# Altium PCB PCB1.pcbdoc
Units mil, origin at the board's own origin, x right, y up, seen from the top; angles counter-clockwise.
Board outline 1426.3 x 823.83 mil, 2 copper layers (Top Layer, Bottom Layer); 5 components, 12 nets, 36 pads, 73 vias.
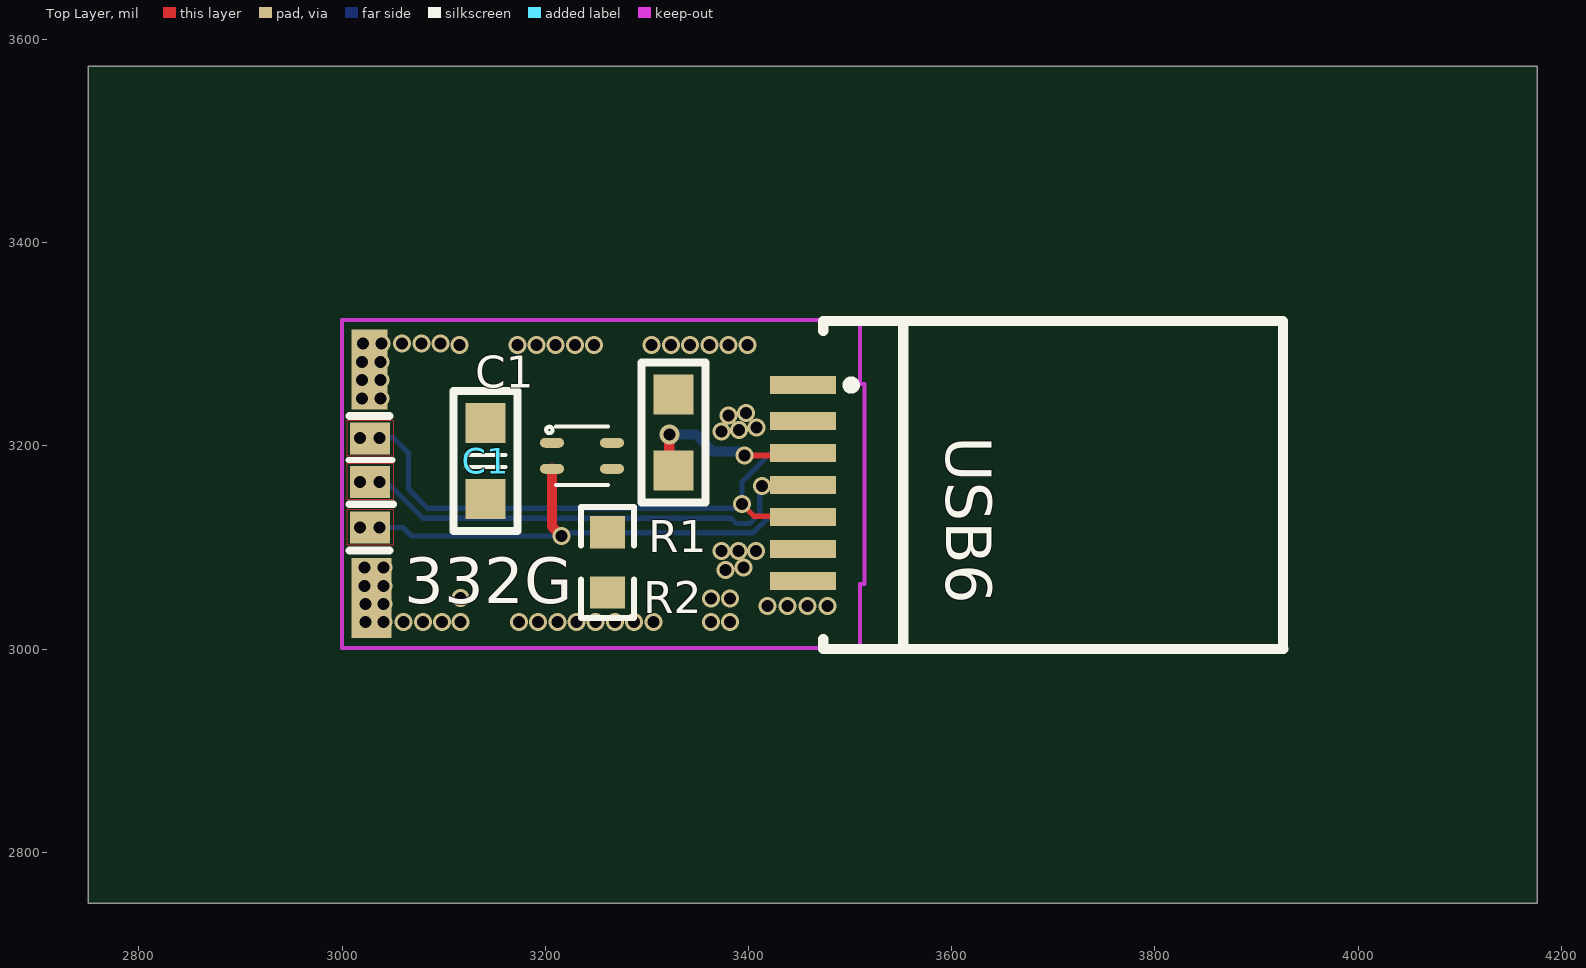
[diagram p0: Top Layer view]
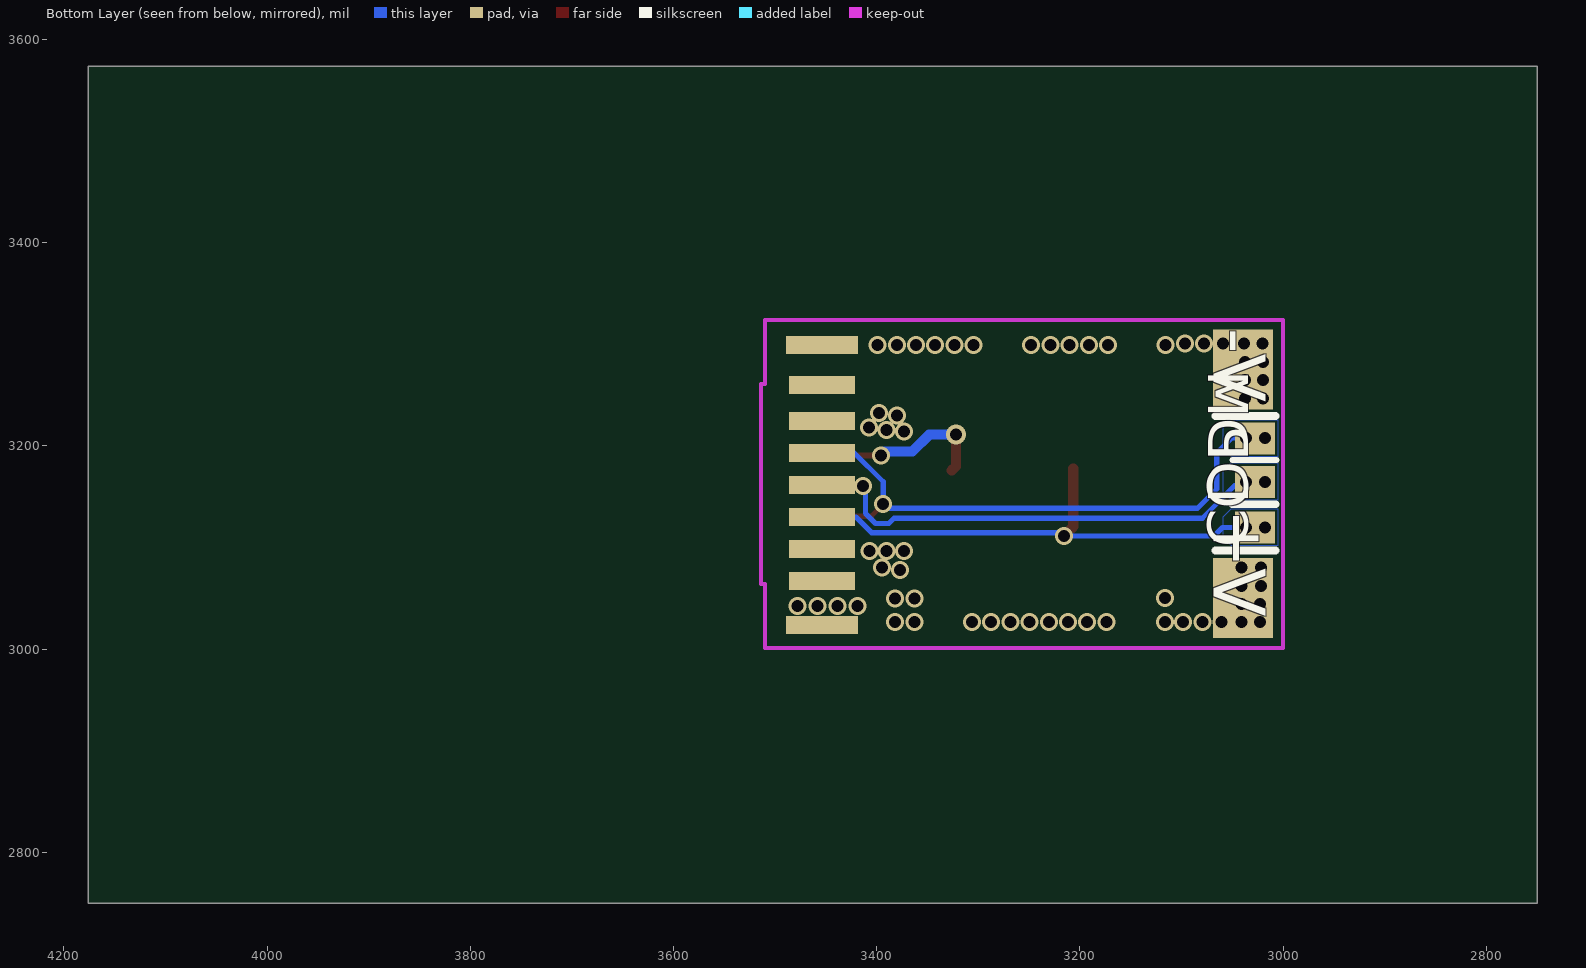
[diagram p1: Bottom Layer view, seen from below]

## Layer stack, top to bottom
Top Layer: signal copper (thickness not stored)
Dielectric: dielectric 12.6, FR-4, Dk 4.8
Bottom Layer: signal copper (thickness not stored)

## Board outline
4176.3,2750 2750,2750 2750,3573.83 4176.3,3573.83

## Design rules (kind name [scope] priority, off if disabled: settings)
BoardOutlineClearance copperThickness1oz [All] p0: genericclearance=10 ignorepadtopadclearanceinfootprint=FALSE except(0: Arc-SplitContinuation Track-SplitContinuation SMDPad-SplitContinuation THPad-SplitContinuation Via-SplitContinuation Fill-SplitContinuation Poly-SplitContinuation Region-SplitContinuation Text-SplitContinuation; 6: Track-CutoutEdge SMDPad-CutoutEdge THPad-CutoutEdge Via-CutoutEdge Region-CutoutEdge; 11.8: Track-OutlineEdge SMDPad-OutlineEdge THPad-OutlineEdge Via-OutlineEdge Fill-OutlineEdge Region-OutlineEdge Poly-OutlineEdge Text-OutlineEdge Fill-CutoutEdge)
BoardOutlineClearance copperThickness2oz [All] p0: genericclearance=10 ignorepadtopadclearanceinfootprint=FALSE except(0: Arc-SplitContinuation Track-SplitContinuation SMDPad-SplitContinuation THPad-SplitContinuation Via-SplitContinuation Fill-SplitContinuation Poly-SplitContinuation Region-SplitContinuation Text-SplitContinuation; 6: Track-CutoutEdge SMDPad-CutoutEdge THPad-CutoutEdge Via-CutoutEdge Region-CutoutEdge; 11.8: Track-OutlineEdge SMDPad-OutlineEdge THPad-OutlineEdge Via-OutlineEdge Fill-OutlineEdge Region-OutlineEdge Poly-OutlineEdge Text-OutlineEdge Fill-CutoutEdge)
Clearance copperThickness1oz [(InNet('$1N666') OR InNet('DM1') OR InNet('DP1') OR InNet('GND1') OR InNet('VBUS1') OR InNet('DP') OR InNet('DM') OR InNet('$1N410') OR InNet('CC') OR InNet('$1N950') OR InNet('GND') OR InNet('VBUS'))] p1: gap=7 ignorepadtopadclearanceinfootprint=FALSE except(4: Track-Track; 6: Track-SMDPad SMDPad-SMDPad Track-THPad SMDPad-THPad THPad-THPad Track-Via SMDPad-Via THPad-Via Via-Via SMDPad-Fill THPad-Fill Via-Fill Fill-Fill Track-Region SMDPad-Region THPad-Region Via-Region Region-Region Track-Poly SMDPad-Poly THPad-Poly Via-Poly Fill-Poly Region-Poly Poly-Poly Track-Text SMDPad-Text THPad-Text Via-Text Fill-Text Region-Text Poly-Text Text-Text; 6.9: Track-Hole SMDPad-Hole THPad-Hole Via-Hole Fill-Hole Region-Hole Poly-Hole Text-Hole Sheet-Hole; 11.8: Track-Fill Fill-Region Track-Sheet SMDPad-Sheet THPad-Sheet Via-Sheet Fill-Sheet Region-Sheet Poly-Sheet Text-Sheet)
Clearance copperThickness2oz [All] p1: gap=7 ignorepadtopadclearanceinfootprint=FALSE except(6: Track-SMDPad SMDPad-SMDPad Track-THPad SMDPad-THPad THPad-THPad Track-Via SMDPad-Via THPad-Via Via-Via SMDPad-Fill THPad-Fill Via-Fill Fill-Fill Track-Region SMDPad-Region THPad-Region Via-Region Region-Region Track-Poly SMDPad-Poly THPad-Poly Via-Poly Fill-Poly Region-Poly Poly-Poly Track-Text SMDPad-Text THPad-Text Via-Text Fill-Text Region-Text Poly-Text Text-Text; 6.9: Track-Hole SMDPad-Hole THPad-Hole Via-Hole Fill-Hole Region-Hole Poly-Hole Text-Hole Sheet-Hole; 8: Track-Track; 11.8: Track-Fill Fill-Region Track-Sheet SMDPad-Sheet THPad-Sheet Via-Sheet Fill-Sheet Region-Sheet Poly-Sheet Text-Sheet)
DiffPairsRouting differentialPair [All] p1: maxuncoupledlength=10 minlimit=5.9843 maxlimit=5.9843 mostfreqgap=5.9843 toplayer_minwidth=5 toplayer_prefwidth=10 toplayer_maxwidth=100 bottomlayer_minwidth=5 bottomlayer_prefwidth=10 bottomlayer_maxwidth=100
PasteMaskExpansion pasteMaskExpansion [All] p1: expansion=0
PlaneConnect innerPlane [All] p1: planeconnectstyle=Relief reliefexpansion=20 reliefentries=4 reliefconductorwidth=10 reliefairgap=10
PolygonConnect copperRegion [All] p1: connectstyle=Direct reliefentries=4 reliefconductorwidth=10 polygonreliefangle="90 Angle" airgapwidth=10
RoutingVias viaSize [All] p1: viastyle="Through Hole" holewidth=12.0078 minholewidth=11.811 maxholewidth=248.0314 width=24.0158 minwidth=19.685 maxwidth=393.7008
SolderMaskExpansion solderMaskExpansion [All] p1: useseparateexpansions=TRUE expansion=2.0079 expansionbottom=2.0079
Width copperThickness1oz [All] p1: maxlimit=100 minlimit=5 preferedwidth=10
Width copperThickness2oz [All] p1: maxlimit=100 minlimit=8 preferedwidth=10

## Components (designator, comment, footprint, x,y, rotation, side; value= is the part's Value field where it differs from the comment)
332G "" ODFN-4_L1.6-W1.6 3236.24,3190.24 r180 top
C1 "" 0603C 3141.24,3185.24 r90 top
R1 "" 0603R 3326.24,3215.24 r270 top
R2 "" R0603 3261.24,3085.24 r270 top
USB6 "" TYPE-C14P 3453.86,3161.42 r270 top

## Footprints (in the part's own frame and the unit in brackets; to place one, negate y for a bottom-side part, rotate by r counter-clockwise, add the part's x,y. Pads: shape width x height; smd on the part's side, far side on the other; paste and mask are expansions set on the pad)
0603C [mm]
  rect 1x1 smd: 1(-0.95,0) 2(0.95,0)
  silkscreen extent -1.75,-0.8 1.75,0.8
0603R [mm]
  rect 1x1 smd: 1(-0.9,0) 2(1,0)
  silkscreen extent -1.7,-0.8 1.8,0.8
ODFN-4_L1.6-W1.6 [mm]
  oval 0.6x0.25 smd: 1(0.75,-0.325) 2(0.75,0.325) 3(-0.75,0.325) 4(-0.75,-0.325)
  silkscreen extent -0.65,-0.73 0.9,0.73
R0603 [mil]
  rect 31.75x34.02 smd: 1(-29.66,0) 2(29.66,0)
  silkscreen extent -55,-26 55,26
TYPE-C14P [mm]
  rect 0.45x1.65 smd far side: CC1(0.8,0) DM(-0.8,0) DP(0,0) GND(-2.5,0) GND(2.4,0) VBUS(-1.6,0) VBUS(1.6,0)
  rect 0.45x1.65 smd: CC2(-0.8,0) DM(0.8,0) DP(0,0) GND(-2.5,0) GND(2.4,0) VBUS(-1.6,0) VBUS(1.6,0)
  rect 0.45x1.8 smd far side: GND(-3.5,0) GND(3.5,0)
  silkscreen extent -4.1,0.5 4.1,12

## Free pads (board coordinates)
  rect 35.43x78.74 smd: 7(3026.77,3275.28)
  rect 39.37x31.5 smd: 7(3027.56,3119.77) 7(3027.56,3164.65) 7(3027.56,3207.17)
  rect 39.37x31.5 smd far side: 7(3027.56,3119.77) 7(3027.56,3164.65) 7(3027.56,3207.17)
  rect 39.37x78.74 smd: 7(3028.74,3050.48)
  rect 59.06x78.74 smd far side: 7(3039.37,3050.48) 7(3039.37,3275.28)

## Via types
v1: diameter 17.72, hole 11.81, Top Layer to Bottom Layer, 72 vias
v2: diameter 19.68, hole 11.81, Top Layer to Bottom Layer, 1 vias

## Nets (pads, with @x,y where several pads share a name; then routed paths per layer and width w, separated by ;. In a path a pad name is that pad's centre, name@x,y a point inside that pad or via, vN(x,y) a via of type N, cw(c..) or ccw(c..) an arc to the next point about the centre after c; other vN are vias at no path point)
$1N410: R1.2 USB6.CC2 | length 178
  Top Layer w5.91: v1(3396.06,3190.63) 3427.95,3190.63 3430.23,3192.91 USB6.CC2
  Top Layer w10: v2(3322.09,3211.03) 3322.09,3180.02 R1.2
  Bottom Layer w10: v2(3322.09,3211.03) 3348.4,3211.03 3365.01,3194.41 3392.28,3194.41 v1(3396.06,3190.63)
$1N666: 
$1N950: 332G.3 C1.1 R2.1
CC: 332G.2 pad.7@3027.56,3119.77 USB6.CC1 | length 507.2
  Top Layer w10: 332G.2 3206.7,3120.55 v1(3215.83,3111.42)
  Bottom Layer w5.12: pad.7@3027.56,3119.77 v1(3036.62,3119.77) 3059.84,3119.77 3068.19,3111.42 v1(3215.83,3111.42) 3218.99,3114.59 3405.06,3114.59 3420.39,3129.92 USB6.CC1
  other v1: 3017.72,3119.77
DM: pad.7@3027.56,3207.17 USB6.DM | length 577.6
  Top Layer w5.12: v1(3393.7,3142.6) 3405.51,3130.79 3452.99,3130.79 USB6.DM@3453.86,3129.93
  Bottom Layer w5.12: pad.7@3027.56,3207.17 3028.35,3207.96 v1(3036.62,3207.96) 3050.4,3207.96 3065.36,3193 3065.36,3157.56 3084.25,3138.66 3389.76,3138.66 v1(3393.7,3142.6) 3393.7,3164.65 3422.84,3193.78 3452.99,3193.78 USB6.DM@3453.86,3192.92
  other v1: 3017.72,3207.96
DM1: 
DP: pad.7@3027.56,3164.65 USB6.DP | length 516.7
  Top Layer w5.12: v1(3413.39,3160.32) 3414.49,3161.42 USB6.DP@3453.86,3161.42
  Bottom Layer w5.12: pad.7@3027.56,3164.65 v1(3036.62,3164.65) 3040.55,3160.71 3047.79,3160.71 3079.68,3128.82 3383.05,3128.82 3388.17,3123.7 3401.3,3123.7 3411.12,3133.52 3411.12,3159.19 v1@3412.82,3160.89 ; v1(3413.39,3160.32) v1@3412.82,3160.89 ; USB6.DP@3453.86,3161.42 3412.29,3161.42 v1@3412.82,3160.89
  other v1: 3017.72,3164.65
DP1: 
GND: USB6.GND@3453.86,3066.93
GND1: 332G.4 C1.2 pad.7@3026.77,3275.28 pad.7@3039.37,3275.28 R1.1 USB6.GND@3453.86,3023.63 USB6.GND@3453.86,3066.93 USB6.GND@3453.86,3259.85 USB6.GND@3453.86,3299.22
  other v1: 3418.9,3042.6 3438.58,3042.6 3458.27,3042.6 3477.95,3042.6 3019.69,3246.54 3037.8,3246.54 3019.69,3264.65 3037.8,3264.65 3019.69,3282.76 3037.8,3282.76 3115.75,3299.29 3172.44,3299.29 3191.34,3299.29 3210.24,3299.29 3229.14,3299.29 3248.03,3299.29 3304.73,3299.29 3323.62,3299.29 3342.52,3299.29 3361.42,3299.29 3380.32,3299.29 3399.21,3299.29 3020.47,3300.87 3038.58,3300.87 3059.06,3300.87 3077.95,3300.87 3096.85,3300.87
VBUS: USB6.VBUS@3453.86,3224.41
VBUS1: pad.7@3028.74,3050.48 pad.7@3039.37,3050.48 R2.2 USB6.VBUS@3453.86,3098.43 USB6.VBUS@3453.86,3224.41
  other v1: 3022.84,3026.85 3040.95,3026.85 3060.63,3026.85 3079.53,3026.85 3098.43,3026.85 3116.54,3026.85 3174.02,3026.85 3192.91,3026.85 3211.81,3026.85 3230.71,3026.85 3249.61,3026.85 3268.51,3026.85 3287.4,3026.85 3306.3,3026.85 3362.99,3026.85 3381.89,3026.85 3022.84,3044.18 3040.95,3044.18 3116.54,3050.48 3362.99,3049.69 3381.89,3049.69 3022.05,3062.29 3040.95,3062.29 3377.17,3078.04 3022.05,3080.4 3040.95,3080.4 3394.88,3080.4 3373.43,3096.34 3390.36,3096.34 3407.28,3096.34 3373.23,3214.26 3390.55,3215.83 3407.87,3218.19 3380.32,3230 3397.64,3232.37
pads on no net: 332G.1

## Polygon pours and split planes (outlines as drawn)
VBUS1 on Bottom Layer (solid, remove dead copper, pour order 14): 3492.13,3239.06 3420.08,3239.06 3415.75,3243.39 3368.5,3243.39 3362.21,3237.09 3362.21,3217.41 3360.24,3215.44 3360.24,3195.29 3387.67,3195.29 3399.16,3206.78 3492.13,3206.78
GND1 on Top Layer (solid, remove dead copper, pour order 0): 3500,3000.87 3401.78,3000.87 3401.78,3072.73 3408.66,3079.61 3500,3079.61
GND1 on Top Layer (solid, remove dead copper, pour order 2): 3498.48,3323.71 3500,3322.19 3500,3243.14 3418.36,3243.14 3415.75,3245.75 3370.08,3245.75 3363.78,3252.05 3363.78,3265.98 3357.24,3272.52 3349.61,3272.52 3349.61,3193 3184.25,3193 3096.85,3192.09 3096.85,3233.94 3000,3233.94 3000,3323.71
VBUS1 on Bottom Layer (solid, remove dead copper, pour order 16): 3412.6,3110.32 3417.32,3115.04 3490.16,3115.04 3490.16,3081.58 3409.06,3081.58 3400.79,3073.31 3400.79,3001.21 3000.33,3001.21 3000,3000.87 3000,3092.21 3188.19,3092.21 3196.58,3100.59 3355.12,3100.59 3355.12,3107.96 3357.48,3110.32
$1N666 on Top Layer (solid, remove dead copper, pour order 4): 3050.2,3102.05 3005.04,3102.05 3005.04,3137.7 3050.2,3137.7
$1N666 on Bottom Layer (solid, remove dead copper, pour order 18): 3059.25,3110.32 3050.99,3102.05 3005.04,3102.05 3005.04,3137.7 3051.53,3137.7 3059.25,3129.97
DP1 on Top Layer (solid, remove dead copper, pour order 6): 3050.2,3147.11 3005.04,3147.11 3005.04,3182.76 3050.2,3182.76
DP1 on Bottom Layer (solid, remove dead copper, pour order 20): 3059.25,3155.38 3050.99,3147.11 3005.04,3147.11 3005.04,3182.76 3051.53,3182.76 3059.25,3175.03
DM1 on Top Layer (solid, remove dead copper, pour order 8): 3050.2,3189.63 3005.04,3189.63 3005.04,3225.28 3050.2,3225.28
DM1 on Bottom Layer (solid, remove dead copper, pour order 22): 3059.25,3197.9 3050.99,3189.63 3005.04,3189.63 3005.04,3225.28 3051.53,3225.28 3059.25,3217.55
VBUS1 on Top Layer (solid, remove dead copper, pour order 10): 3000,3000.87 3000,3077.25 3352.36,3077.25 3352.36,3212.29 3362.21,3222.13 3362.21,3236.3 3368.5,3242.6 3415.75,3242.6 3419.29,3239.06 3492.13,3239.06 3492.13,3206.78 3407.48,3206.78 3407.48,3124.89 3417.32,3115.04 3490.16,3115.04 3490.16,3081.58 3409.06,3081.58 3400.79,3073.31 3400.79,3001.21 3400.45,3000.87
VBUS1 on Bottom Layer (solid, remove dead copper, pour order 24): 3372.44,3241.81 3484.66,3241.81 3491.24,3235.24 3491.24,3210.24 3366.24,3210.24 3366.24,3235.61
$1N950 on Top Layer (solid, remove dead copper, pour order 12): 3109.74,3165.24 3109.74,3085.24 3291.24,3085.24 3291.24,3185.24 3296.24,3190.24 3232.1,3190.24 3232.1,3106.1 3226.24,3100.24 3196.24,3100.24 3196.24,3165.24 3109.74,3165.24
GND1 on Bottom Layer (solid, remove dead copper, pour order 26): 3500,3010.24 3500,3000.87 3401.78,3000.87 3401.78,3072.73 3408.66,3079.61 3436.42,3079.61 3436.42,3243.14 3366.68,3243.14 3359.84,3236.3 3359.84,3152.05 3352.76,3144.96 3077.17,3144.96 3069.29,3152.84 3069.29,3219.77 3055.06,3234 3000,3234 3000,3323.71 3500,3323.71 3500,3315.24 3506.24,3315.24 3510,3311.48 3510,3010.24

## Keep-outs
Board Outline Layer:
  lines w3.94: 3000,3000.87 3000,3323.71 3510,3323.71 3510,3260.71 3514.06,3260.71 3514.06,3063.86 3510,3063.86 3510,3000.87 3000,3000.87

## Silkscreen, mask and mechanical layers (free items; w line width, h text height)
Top Silkscreen Layer:
  lines w5.91: 3006.5,3185.91 3049.8,3185.91
  lines w7.09: 3007.09,3142.6 3050.4,3142.6
  lines w7.87: 3007.48,3096.93 3046.85,3096.93 ; 3007.48,3229.22 3046.85,3229.22
  text "C1" at 3131.24,3257.43 h31.5
Bottom Silkscreen Layer:
  lines w5.91: 3006.5,3185.91 3049.8,3185.91
  lines w7.09: 3007.09,3142.6 3050.4,3142.6
  lines w7.87: 3007.48,3096.93 3066.54,3096.93 ; 3007.48,3229.22 3066.54,3229.22
  text "V-" at 3068.51,3242.97 h51.18 r90
  text "DM" at 3073.66,3185.91 h39.37 r90
  text "DP" at 3073.66,3143.06 h39.37 r90
  text "CC" at 3074.02,3100.08 h39.37 r90
  text "V+" at 3068.51,3031.58 h51.18 r90
Top Solder Mask Layer:
  region: 3499.45,3000.68 3411.88,3000.68 3411.88,3074.16 3499.45,3074.16
  region: 3500,3249.43 3412.43,3249.43 3412.43,3323.71 3500,3323.71
Bottom Solder Mask Layer:
  region: 3499.93,3000.02 3412.36,3000.02 3412.36,3074.29 3499.93,3074.29
  region: 3500.48,3249.56 3412.91,3249.56 3412.91,3323.83 3500.48,3323.83